# Altium PCB E77whistle.PcbDoc
Units mm, origin at the board's own origin, x right, y up, seen from the top; angles counter-clockwise.
Board outline 20 x 27 mm, 2 copper layers (Top Layer, Bottom Layer), stack 1.021 mm thick; 20 components, 21 nets, 111 pads, 44 vias.
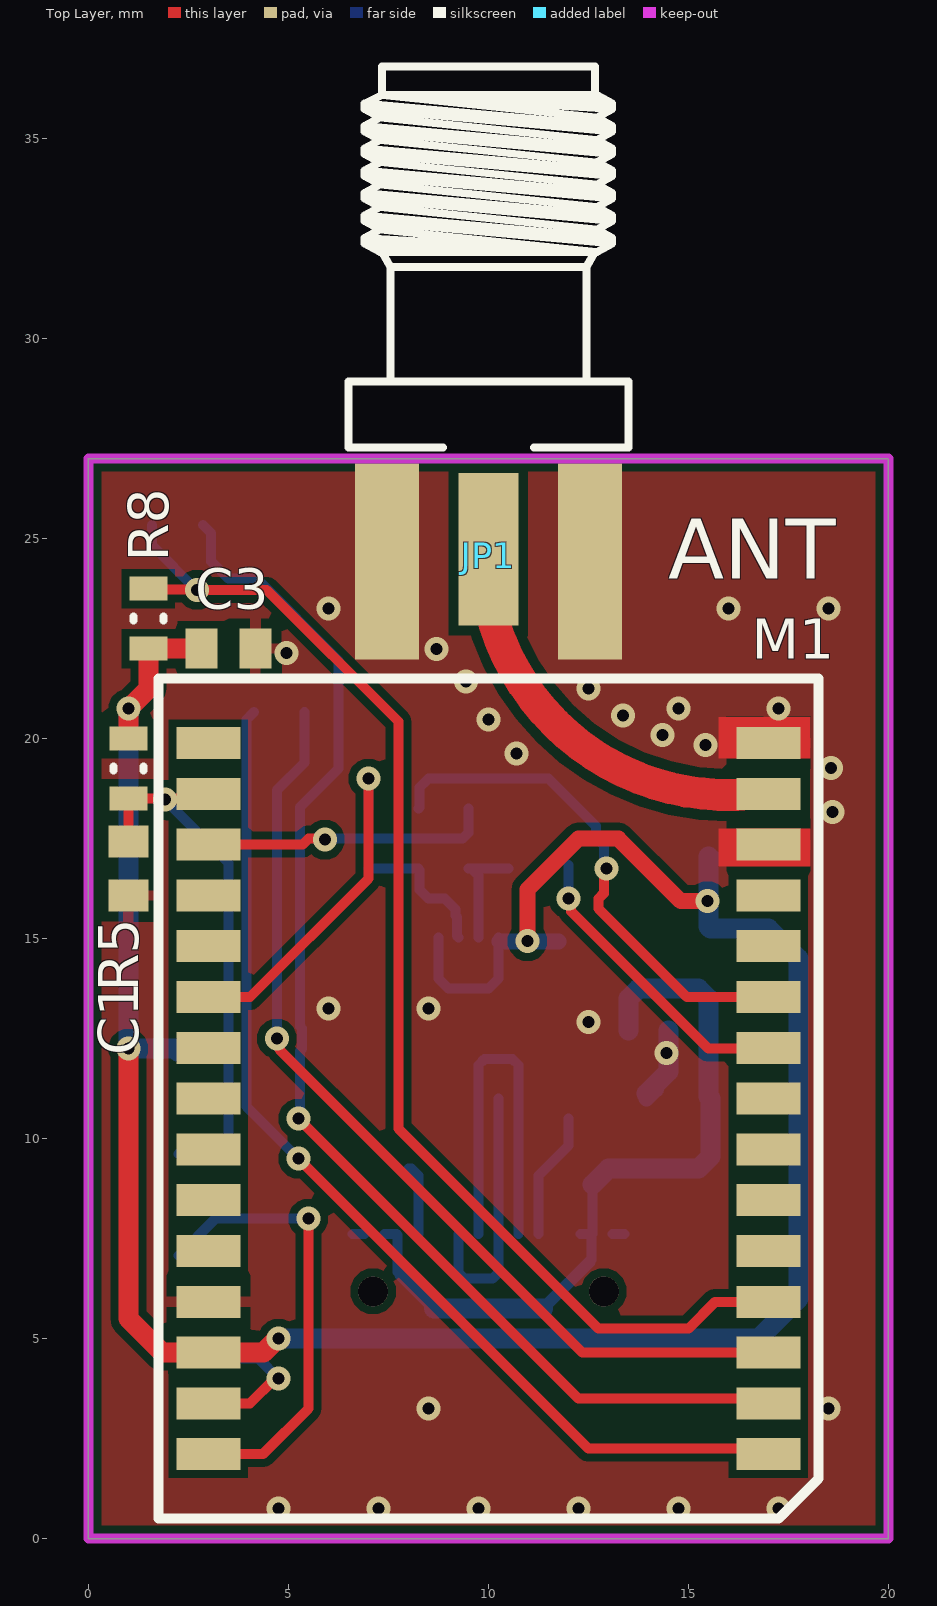
[diagram p0: Top Layer view]
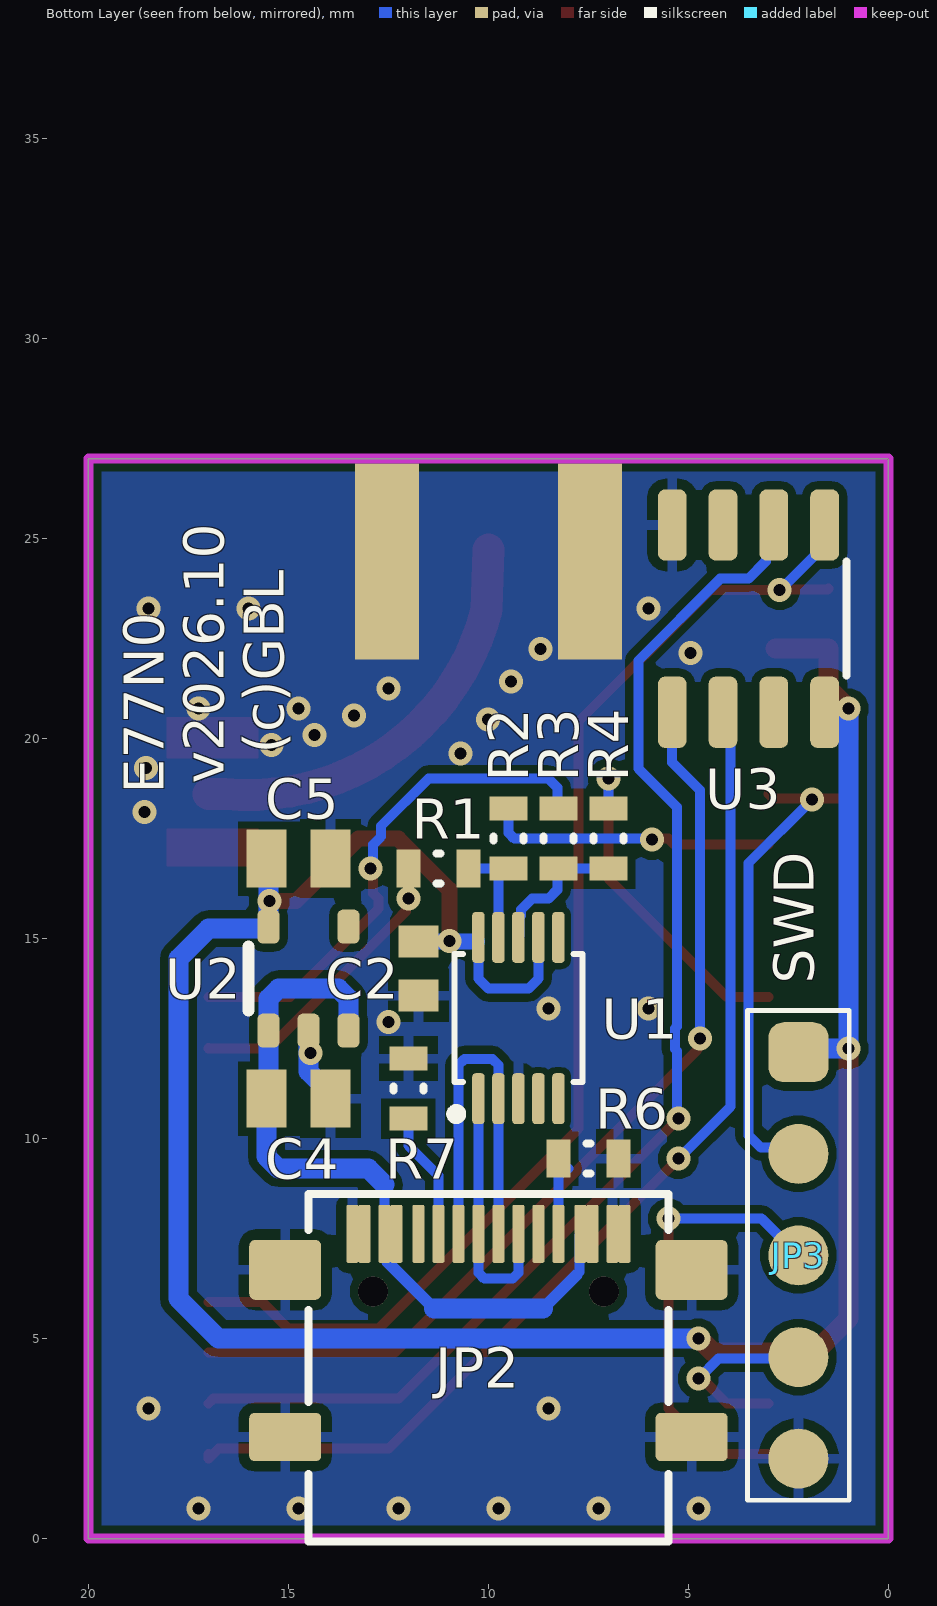
[diagram p1: Bottom Layer view, seen from below]

## Layer stack, top to bottom
Top Solder: solder mask 0.0102, Solder Resist, Dk 3.5
Top Layer: signal copper 0.0356
Dielectric 1: dielectric 0.95, FR-4, Dk 4.8
Bottom Layer: signal copper 0.0356
Bottom Solder: solder mask 0.0102, Solder Resist, Dk 3.5

## Board outline
0,0 0,27 20,27 20,0

## Design rules (kind name [scope] priority, off if disabled: settings)
Clearance Clearance_3 [InComponent('U1')] p1: gap=0.15 ignorepadtopadclearanceinfootprint=FALSE
Clearance Clearance_2 [InNet('NetJP1_1') vs InNet('GND')] p2: gap=0.25 ignorepadtopadclearanceinfootprint=FALSE
Clearance Clearance_1 [InComponent('JP1') vs OnLayer('Keep-Out Layer')] p3: gap=0 ignorepadtopadclearanceinfootprint=FALSE
Clearance [All] p4: gap=0.2 ignorepadtopadclearanceinfootprint=FALSE
ComponentClearance [InComponent('JP2') vs InComponent('M1')] p1: gap=0 collisioncheckmode=3 verticalgap=0 showdistances=FALSE
HoleSize [All] p1: absolutevalues=TRUE maxlimit=5 minlimit=0.025 maxpercent=80.000 minpercent=20.000
MinimumSolderMaskSliver [All] p1: minsoldermaskwidth=0.05
PolygonConnect PolygonConnect_3 [InComponent('JP1') vs IsNamedPolygon('GND_L01_P000') Or IsNamedPolygon('GND_L02_P001')] p1: connectstyle=Direct reliefconductorwidth=0.254 reliefentries=4 polygonreliefangle="90 Angle" airgapwidth=0.254
PolygonConnect PolygonConnect_2 [All vs IsNamedPolygon('GND_L01_P000') Or IsNamedPolygon('GND_L02_P001')] p2: thpad.connectstyle=Relief thpad.reliefconductorwidth=0.254 thpad.reliefentries=4 thpad.polygonreliefangle="90 Angle" thpad.airgapwidth=0.254 smdpad.connectstyle=Relief smdpad.reliefconductorwidth=0.254 smdpad.reliefentries=4 smdpad.polygonreliefangle="90 Angle" smdpad.airgapwidth=0.254 via.connectstyle=Direct via.reliefconductorwidth=0.254 via.reliefentries=4 via.polygonreliefangle="90 Angle" via.airgapwidth=0.254
PolygonConnect PolygonConnect_1 [All vs IsNamedPolygon('GND_L01_P000')] p3: thpad.connectstyle=Relief thpad.reliefconductorwidth=0.254 thpad.reliefentries=4 thpad.polygonreliefangle="90 Angle" thpad.airgapwidth=0.254 smdpad.connectstyle=Relief smdpad.reliefconductorwidth=0.254 smdpad.reliefentries=4 smdpad.polygonreliefangle="90 Angle" smdpad.airgapwidth=0.254 via.connectstyle=Direct via.reliefconductorwidth=0.254 via.reliefentries=4 via.polygonreliefangle="90 Angle" via.airgapwidth=0.254
PolygonConnect [All] p4: connectstyle=Relief reliefconductorwidth=0.254 reliefentries=4 polygonreliefangle="90 Angle" airgapwidth=0.254
RoutingVias [All] p1: holewidth=0.711 width=1.27 viastyle="Through Hole" minholewidth=0.711 minwidth=1.27 maxholewidth=0.711 maxwidth=1.27
SilkToSilkClearance [All] p1: silktosilkclearance=0.1
SilkToSolderMaskClearance [IsPad] p1: minsilkscreentomaskgap=0.1 clearancetoexposedcopper=TRUE
SolderMaskExpansion [All] p1: expansion=0 istentingtop=FALSE
SupplyNets "Schematic Supply Nets_2" [InNet('VBUS')] p1: voltage=0.000
SupplyNets "Schematic Supply Nets_1" [InNet('VCC')] p2: voltage=0.000
SupplyNets "Schematic Supply Nets" [InNet('GND')] p3: voltage=0.000
Width [All] p1: maxlimit=2 minlimit=0.15 preferedwidth=0.2
25 further rules are at their usual default settings.

## Components (designator, comment, footprint, x,y, rotation, side; value= is the part's Value field where it differs from the comment)
C1 "100nF" C-0603 1,16.75 r90 top
C2 "100nF" C-0603 11.75,14.25 r90 bottom
C3 "100nF" C-0603 3.5,22.25 r180 top
C4 "10uF" C-0805 14.75,11 r180 bottom
C5 "10uF" C-0805 14.75,17 r180 bottom
JP1 "EM-SA071-GGT" SMA_F_EDGE 10,26 r270 top
JP2 "L-KLS1-5473" L-KLS1-5473 10,7.62 r180 bottom locked
JP3 "HEADER 5" PLS1-5_SMD 2.25,12.16 r270 bottom
M1 "E77-400M22S" E77XX-M22 10,11 r180 top locked
R1 "nc" R-0603 11.25,16.75 r180 bottom
R2 "nc" R-0603 9.5,17.5 r270 bottom
R3 "nc" R-0603 8.25,17.5 r270 bottom
R4 "nc" R-0603 7,17.5 r270 bottom
R5 "10k" R-0603 1,19.25 r90 top
R6 "5k1" R-0603 7.5,9.5 r180 bottom
R7 "5k1" R-0603 12,11.25 r90 bottom
R8 "100k" R-0603 1.5,23 r270 top
U1 "CH340E" MSOP-10 9.25,13.015 r180 bottom value={Value}
U2 "LP5907MFX-3.0" SOT-23-5 14.5,14 r90 bottom
U3 "W25Q64FV" SO-8 3.5,23 r270 bottom

## Footprints (in the part's own frame and the unit in brackets; to place one, negate y for a bottom-side part, rotate by r counter-clockwise, add the part's x,y. Pads: shape width x height; smd on the part's side, far side on the other; paste and mask are expansions set on the pad)
C-0603 [mm] "Chip Capacitor, 2-Leads, Body 1,60x0,80mm, IPC Medium Density"
  rect 0.8x1 smd: 1(-0.675,0) 2(0.675,0)
  body extent -0.8,-0.4 0.8,0.4, height 0.8
C-0805 [mm] "Chip Capacitor, 2-Leads, Body 2,00x1,25mm, IPC Medium Density"
  rect 1x1.45 smd: 1(-0.8,0) 2(0.8,0)
  body extent -1,-0.63 1,0.63, height 1.25
E77XX-M22 [mm]
  rect 1.6x0.8 smd: 1(-7,8.89) 2(-7,7.62) 3(-7,6.35) 4(-7,5.08) 5(-7,3.81) 6(-7,2.54) 7(-7,1.27) 8(-7,0) 9(-7,-1.27) 10(-7,-2.54) 11(-7,-3.81) 12(-7,-5.08) 13(-7,-6.35) 14(-7,-7.62) 15(-7,-8.89) 16(7,-8.89) 17(7,-7.62) 18(7,-6.35) 19(7,-5.08) 20(7,-3.81) 21(7,-2.54) 22(7,-1.27) 23(7,0) 24(7,1.27) 25(7,2.54) 26(7,3.81) 27(7,5.08) 28(7,6.35) 29(7,7.62) 30(7,8.89)
  silkscreen extent -8.25,-10.5 8.25,10.5, body extent -7,-9.68 7,10.3, height 2.7
L-KLS1-5473 [mm] "USB 3.1 Type C"
  rrect20% 1.8x1.2 smd mask+0.07: 1(-5.08,-5.08) 1(5.08,-5.08)
  rrect20% 1.8x1.5 smd mask+0.07: 1(-5.08,-0.9) 1(5.08,-0.9)
  rrect30% 0.3x1.45 smd paste-2 mask+0.07: A1(-3.1,0) A4(-2.6,0) A9(2.6,0) A12(3.4,0) B1(3.1,0) B4(2.3,0) B9(-2.3,0) B12(-3.4,0)
  rrect30% 0.3x1.45 smd mask+0.07: A5(-1.25,0) A6(-0.25,0) A7(0.25,0) A8(1.25,0) B5(1.75,0) B6(0.75,0) B7(-0.75,0) B8(-1.75,0)
  round 0.75 hole 0.75 unplated paste-2539.97 mask+0.07: MH(-2.885,-1.44) MH(2.885,-1.44)
  silkscreen extent -4.5,-7.69 4.5,1, body extent -4.47,-7.7 4.47,0.2, height 3.2
MSOP-10 [mm] "Small Outline Pkg (SOP), 0.50 mm pitch; 10 pin, 3.00 mm L X 3.00 mm W X 1.10 mm H body"
  rrect52% 0.31x1.27 smd: 1(-1,-2.015) 2(-0.5,-2.015) 3(0,-2.015) 4(0.5,-2.015) 5(1,-2.015) 6(1,2.015) 7(0.5,2.015) 8(0,2.015) 9(-0.5,2.015) 10(-1,2.015)
  silkscreen extent -1.68,-2.52 1.6,1.6, body extent -1.5,-2.42 1.5,2.42, height 1.1
PLS1-5_SMD [mm] "For SWD"
  rrect50% 1.5x1.5 smd paste-2539.97: 1(0,0)
  round 1.5 smd paste-2539.97: 2(2.54,0) 3(5.08,0) 4(7.62,0) 5(10.16,0)
  silkscreen extent -1.04,-1.27 11.2,1.27
R-0603 [mm] "Chip Resistor, 2-Leads, Body 1,60x0,82mm, IPC Medium Density"
  rect 0.6x0.95 smd: 1(-0.75,0) 2(0.75,0)
  silkscreen extent -0.05,-0.38 0.05,0.38, body extent -0.8,-0.4 0.8,0.4, height 0.45
SMA_F_EDGE [mm] "SMA End Launch Jack for 1.58mm PCB, 50 Ohm, Flat Tab Contact"
  rect 3.81x1.5 smd: 1(1.27,0)
  rect 4.9x1.6 smd: 2(1.575,2.54) 2(1.575,-2.54)
  rect 4.9x1.6 smd far side: 2(1.575,2.54) 2(1.575,-2.54)
  silkscreen extent -10.81,-3.5 -1.28,3.5, body extent -10.73,-3.25 2.77,3.25, height 3.7
SO-8 [mm]
  rrect50% 1.78x0.72 smd: 1(-2.34,1.905) 2(-2.34,0.635) 3(-2.34,-0.635) 4(-2.34,-1.905) 5(2.34,-1.905) 6(2.34,-0.635) 7(2.34,0.635) 8(2.34,1.905)
  silkscreen extent -1.42,2.45 1.43,2.45, body extent -3.07,-2.44 3.07,2.44, height 1.78
SOT-23-5 [mm]
  rrect50% 0.85x0.55 smd mask+0.06: 1(-1.3,1) 2(-1.3,0) 3(-1.3,-1) 4(1.3,-1) 5(1.3,1)
  silkscreen extent -0.8,1.5 0.8,1.5, body extent -1.4,-1.45 1.4,1.45, height 1.45

## Part data
C1 C2 C3 C4 C5: library part CAPN, Voltage=50V, Вид=Конденсатор, Точність/група=NP0
JP1: library part SMA, "SMA Female R/A PCB Mount", Вид=Роз'єм
R1 R2 R3 R4 R5 R6 R7 R8: library part RES, Вид=Резистор, Точність/група=5%
U2: library part LP5907, "250mA Low-Dropout Regulator", Вид=Мікросхема
JP2 U1: Mounting  Method=SMD
JP3: Вид=Роз'єм
U3: Вид=Мікросхема

## Via types
v1: diameter 0.6, hole 0.3, Top Layer to Bottom Layer, tented both sides, 44 vias

## Nets (pads, with @x,y where several pads share a name; then routed paths per layer and width w, separated by ;. In a path a pad name is that pad's centre, name@x,y a point inside that pad or via, vN(x,y) a via of type N, cw(c..) or ccw(c..) an arc to the next point about the centre after c; other vN are vias at no path point)
DN: JP2.A7 JP2.B7 U1.2 | length 9.6
  Bottom Layer w0.25: JP2.A7 9.75,11.839 9.896,11.985 10.604,11.985 10.75,11.839 10.75,8.836 JP2.B7
DP: JP2.A6 JP2.B6 U1.1 | length 6.4
  Bottom Layer w0.25: JP2.B6 9.25,6.646 9.396,6.5 10.104,6.5 10.25,6.646 U1.1
FLASH_CE: M1.4 R8.1 U3.1 | length 31.5
  Top Layer w0.25: R8.1 1.516,23.734 2.703,23.734 v1(2.718,23.718) 4.457,23.718 7.75,20.425 7.75,10.25 12.75,5.25 15,5.25 15.67,5.92 M1.4
  Bottom Layer w0.25: U3.1 1.595,24.826 2.702,23.718 v1(2.718,23.718)
GND: C1.1 C2.1 C3.1 C4.2 C5.2 JP1.2 JP2.1 JP2.A1 JP2.A12 JP2.B1 JP2.B12 JP3.5 M1.13 M1.15 M1.27 R6.2 R7.2 U1.3 U2.2 U3.4 | length 2.7
  Bottom Layer w0.25: JP2.A12 JP2.B1 ; JP2.A1 JP2.B12
  Bottom Layer w0.4: C4.2 C4.2@14.184,11.234
  Bottom Layer w0.5: C4.2@13.95,11.127 14.5,11.677 U2.2
  other v1: 4.75,0.75 7.25,0.75 9.75,0.75 12.25,0.75 14.75,0.75 17.25,0.75 8.5,3.25 18.5,3.25 14.447,12.145 12.504,12.921 6,13.25 8.5,13.25 18.599,18.161 18.566,19.26 10.703,19.633 15.424,19.838 14.354,20.094 10.006,20.484 13.365,20.575 14.75,20.75 17.25,20.75 12.502,21.258 9.434,21.424 4.947,22.145 8.697,22.241 6,23.25 16,23.25 18.5,23.25
MISO: M1.2 U3.2 | length 31.8
  Top Layer w0.25: v1(5.25,10.5) 12.25,3.5 16.88,3.5 M1.2
  Bottom Layer w0.25: U3.2 3.066,25.139 3.066,24.434 3.5,24 4.205,24 6.25,21.955 6.25,19.25 5.288,18.288 5.288,12.806 5.335,12.759 5.335,12.241 5.288,12.194 5.288,10.538 v1(5.25,10.5)
MOSI: M1.3 U3.5 | length 24.1
  Top Layer w0.25: v1(4.71,12.5) 4.777,12.433 4.777,12.223 12.35,4.65 M1.3
  Bottom Layer w0.25: v1(4.71,12.5) 4.71,18.71 5.405,19.405 U3.5
NetJP1_1: JP1.1 M1.14 | length 10.6
  Top Layer w0.8: JP1.1 10.047,23.225 ccw(c16.003,24.736) 16.6,18.62 M1.14
NetJP2_A5: JP2.A5 R7.1 | length 3.2
  Bottom Layer w0.25: JP2.A5 11.25,9.075 12,9.825 R7.1
NetJP2_B5: JP2.B5 R6.1 | length 1.8
  Bottom Layer w0.25: R6.1@8,9.25 8.075,9.25 8.25,9.075 JP2.B5
NRST: C1.2 JP3.2 M1.17 R5.1 | length 13.6
  Top Layer w0.25: C1.2 R5.1 2.88,18.5 M1.17
  Bottom Layer w0.25: v1(1.913,18.475) 3.5,16.888 3.5,10.084 3.188,9.773 2.403,9.773 JP3.2
PA2: M1.9 R1.1 | length 7.6
  Top Layer w0.25: v1(12,16) 12.067,15.933 12.067,15.683 12.3,15.45 15.5,12.25 17,12.25 M1.9
  Bottom Layer w0.25: v1(12,16) R1.1@12,16.837
PA3: M1.10 R3.1 | length 13
  Top Layer w0.25: v1(12.95,16.75) 12.883,16.683 12.883,16.133 12.75,16 12.75,15.75 14.96,13.54 M1.10
  Bottom Layer w0.25: R3.1 8.279,18.279 8.279,18.779 8.5,19 11.5,19 12.683,17.817 12.683,17.55 12.883,17.35 12.883,16.817 v1(12.95,16.75)
PA9: M1.18 R2.1 | length 7.2
  Top Layer w0.25: M1.18 5.35,17.35 5.5,17.5 v1@6,17.5
  Bottom Layer w0.25: v1@6,17.5 9.354,17.5 9.5,17.646 R2.1
  other v1: 5.913,17.475
PA10: M1.21 R4.1 | length 8.5
  Top Layer w0.25: M1.21 4.04,13.54 7,16.5 v1(7,19)
  Bottom Layer w0.25: R4.1 v1(7,19)
RXD: R3.2 R4.2 U1.8 | length 3.6
  Bottom Layer w0.25: R4.2 R3.2@8.213,16.75 ; R3.2 8.279,16.721 8.279,16.221 8.5,16 8.912,16 9.18,15.732 9.18,15.58 9.22,15.54 9.22,15.06 U1.8
SCK: M1.1 U3.6 | length 26.7
  Top Layer w0.25: v1(5.25,9.5) 12.5,2.25 16.75,2.25 17,2 M1.1
  Bottom Layer w0.25: U3.6 3.95,20.475 3.95,10.8 v1(5.25,9.5)
SWCLK: JP3.3 M1.30 | length 11.4
  Top Layer w0.25: M1.30 4.36,2.11 5.5,3.25 v1(5.5,8)
  Bottom Layer w0.25: JP3.3 3.17,8 v1(5.5,8)
SWDIO: JP3.4 M1.29 | length 4.7
  Top Layer w0.25: M1.29 4.035,3.38 4.655,4 v1(4.75,4)
  Bottom Layer w0.25: JP3.4 2.282,4.508 4.242,4.508 v1(4.75,4)
TXD: R1.2 R2.2 U1.9 | length 2.8
  Bottom Layer w0.25: R2.2 R2.2@9.575,16.75 ; U1.9 9.75,16.575 R2.2@9.575,16.75 ; R1.2 R2.2@9.575,16.75
VBUS: C4.1 JP2.A4 JP2.A9 JP2.B4 JP2.B9 U2.1 U2.3 | length 19.4
  Bottom Layer w0.25: JP2.A9 JP2.B4 7.725,7.595 7.725,6.666 7.796,6.596 ; JP2.B9 12.575,7.62 JP2.A4@12.575,7.595 ; JP2.A4@12.529,6.921 12.575,6.966 JP2.A4@12.575,7.595 ; 12.6,8.85 JP2.A4 JP2.A4@12.575,7.595
  Bottom Layer w0.3: 7.796,6.596 8.641,5.75 ; 11.359,5.75 JP2.A4@12.529,6.921
  Bottom Layer w0.5: 8.641,5.75 11.359,5.75 ; 12.6,8.85 13,9.25 15.25,9.25 15.55,9.55 C4.1 15.5,11.05 U2.1 15.5,13.5 15.25,13.75 13.75,13.75 13.5,13.5 U2.3
VCC: C2.2 C3.2 C5.1 JP3.1 M1.28 R5.2 R8.2 U1.7 U1.10 U2.5 U3.8 | length 63.1
  Top Layer w0.4: v1(10.976,14.939) 10.976,16.226 12.25,17.5 13.25,17.5 14.811,15.939 v1(15.476,15.939)
  Top Layer w0.5: v1(1,12.25) 1,5.5 1.85,4.65 4.373,4.65 4.723,5 v1(4.75,5) ; R5.2 v1(1,20.75) 1.5,21.25 R8.2 C3.2
  Bottom Layer w0.25: U1.7 8.75,14 9,13.75 10,13.75 10.25,14 U1.10
  Bottom Layer w0.4: U1.10@10.28,14.925 C2.2
  Bottom Layer w0.5: v1(1,20.75) v1(1,12.25) 2.16,12.25 JP3.1 ; v1(4.75,5) 16.75,5 17.75,6 17.75,14.5 17,15.25 15.55,15.25 U2.5 15.5,16.95 C5.1 C5.1@15.5,17.05
pads on no net: JP2.A8 JP2.B8 JP2.MH M1.5 M1.6 M1.7 M1.8 M1.11 M1.12 M1.16 M1.19 M1.20 M1.22 M1.23 M1.24 M1.25 M1.26 U1.4 U1.5 U1.6 U2.4 U3.3 U3.7

## Polygon pours and split planes (outlines as drawn)
GND on Top Layer "GND_L01_P000" (solid, remove dead copper, pour order 0): 0,0 20,0 20,27 0,27
GND on Bottom Layer "GND_L02_P001" (solid, remove dead copper, pour order 1): 0,0 20,0 20,27 0,27

## Keep-outs
Keep-Out Layer:
  the board outline again, w0.254

## Other copper
Top Layer:
  rectangle net GND: 15.75,16.808 18.054,17.75
  rectangle net GND: 15.75,19.5 18.054,20.544

## Silkscreen, mask and mechanical layers (free items; w line width, h text height)
Top Overlay:
  text "ANT" at 14.5,24 h1.5
Bottom Overlay:
  text "(c)GBL" at 15.12,19.62 h1 r270
  text "v2026.10" at 16.62,18.87 h1 r270
  text "E77N0" at 18.12,18.62 h1 r270
  text "SWD" at 1.87,13.87 h1 r270